# Altium PCB Morpheus_bottom.PcbDoc (part 1 of 2)
Units mm, origin at the board's own origin, x right, y up, seen from the top; angles counter-clockwise.
Board outline 38.8 x 25.11 mm, 4 copper layers (Top Layer, GND, PWR, Bottom Layer), stack 0.981 mm thick; 78 components, 39 nets, 307 pads, 147 vias.
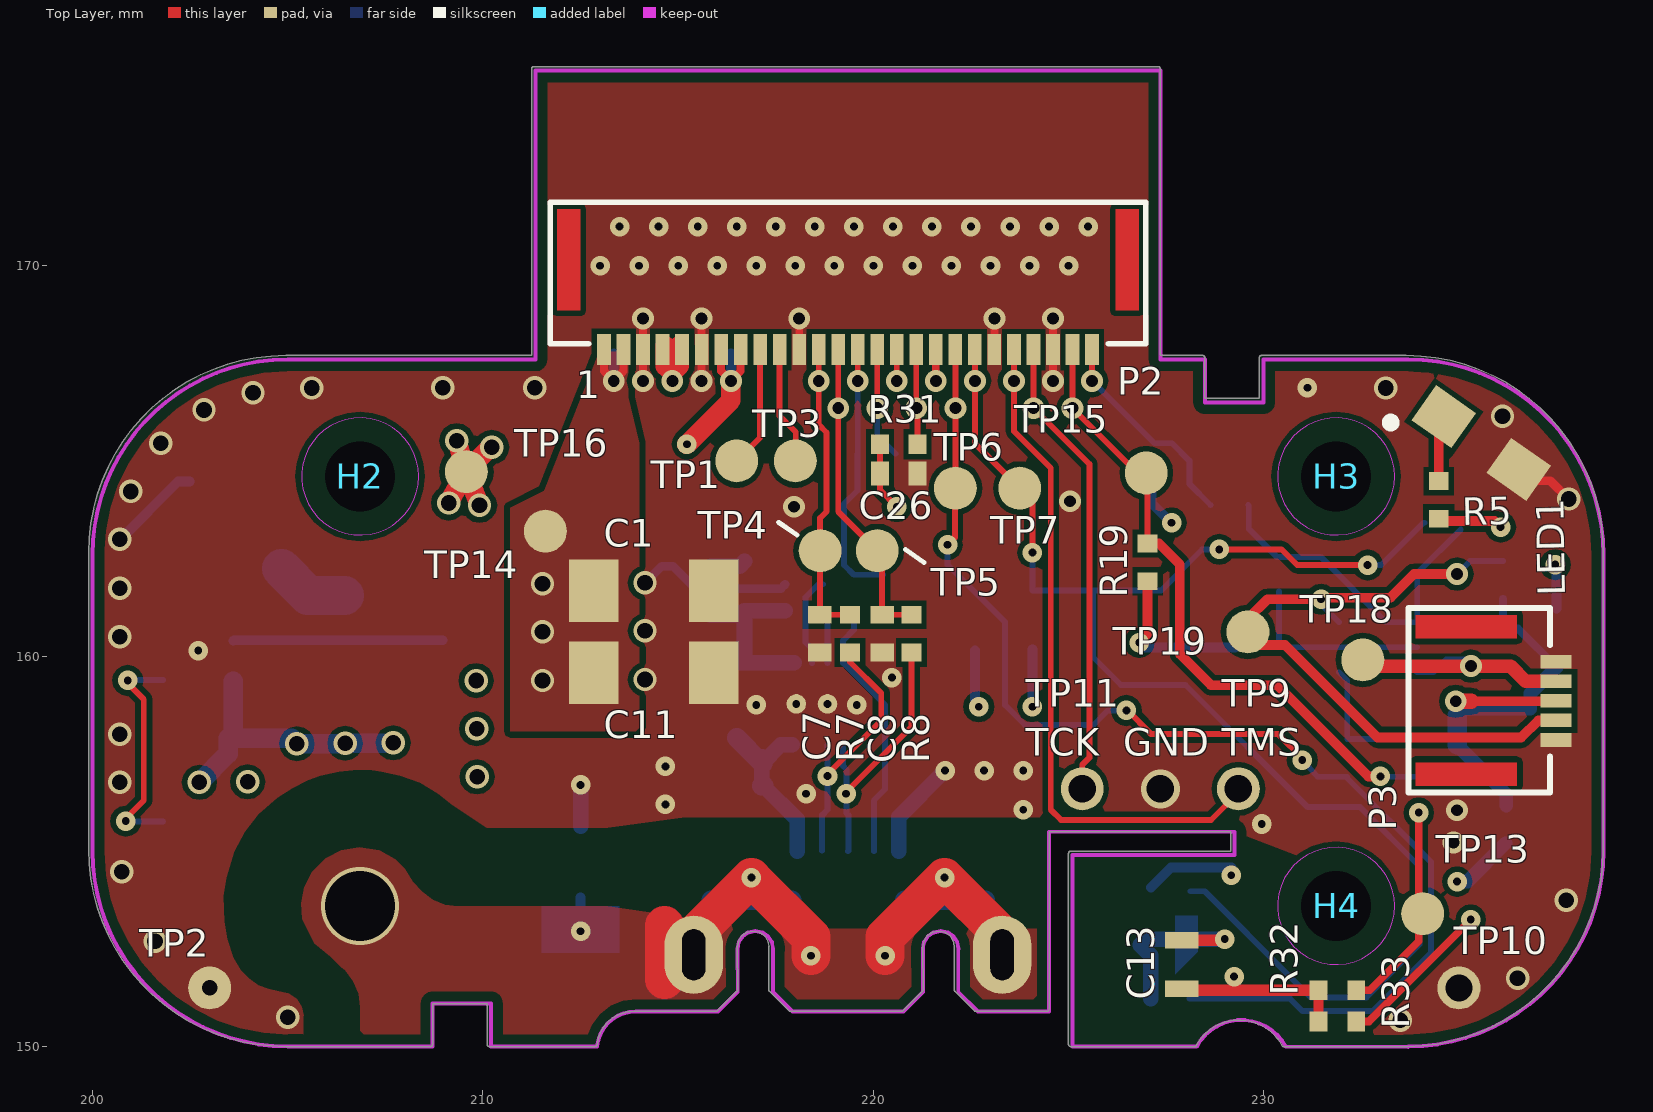
[diagram p0: Top Layer view]
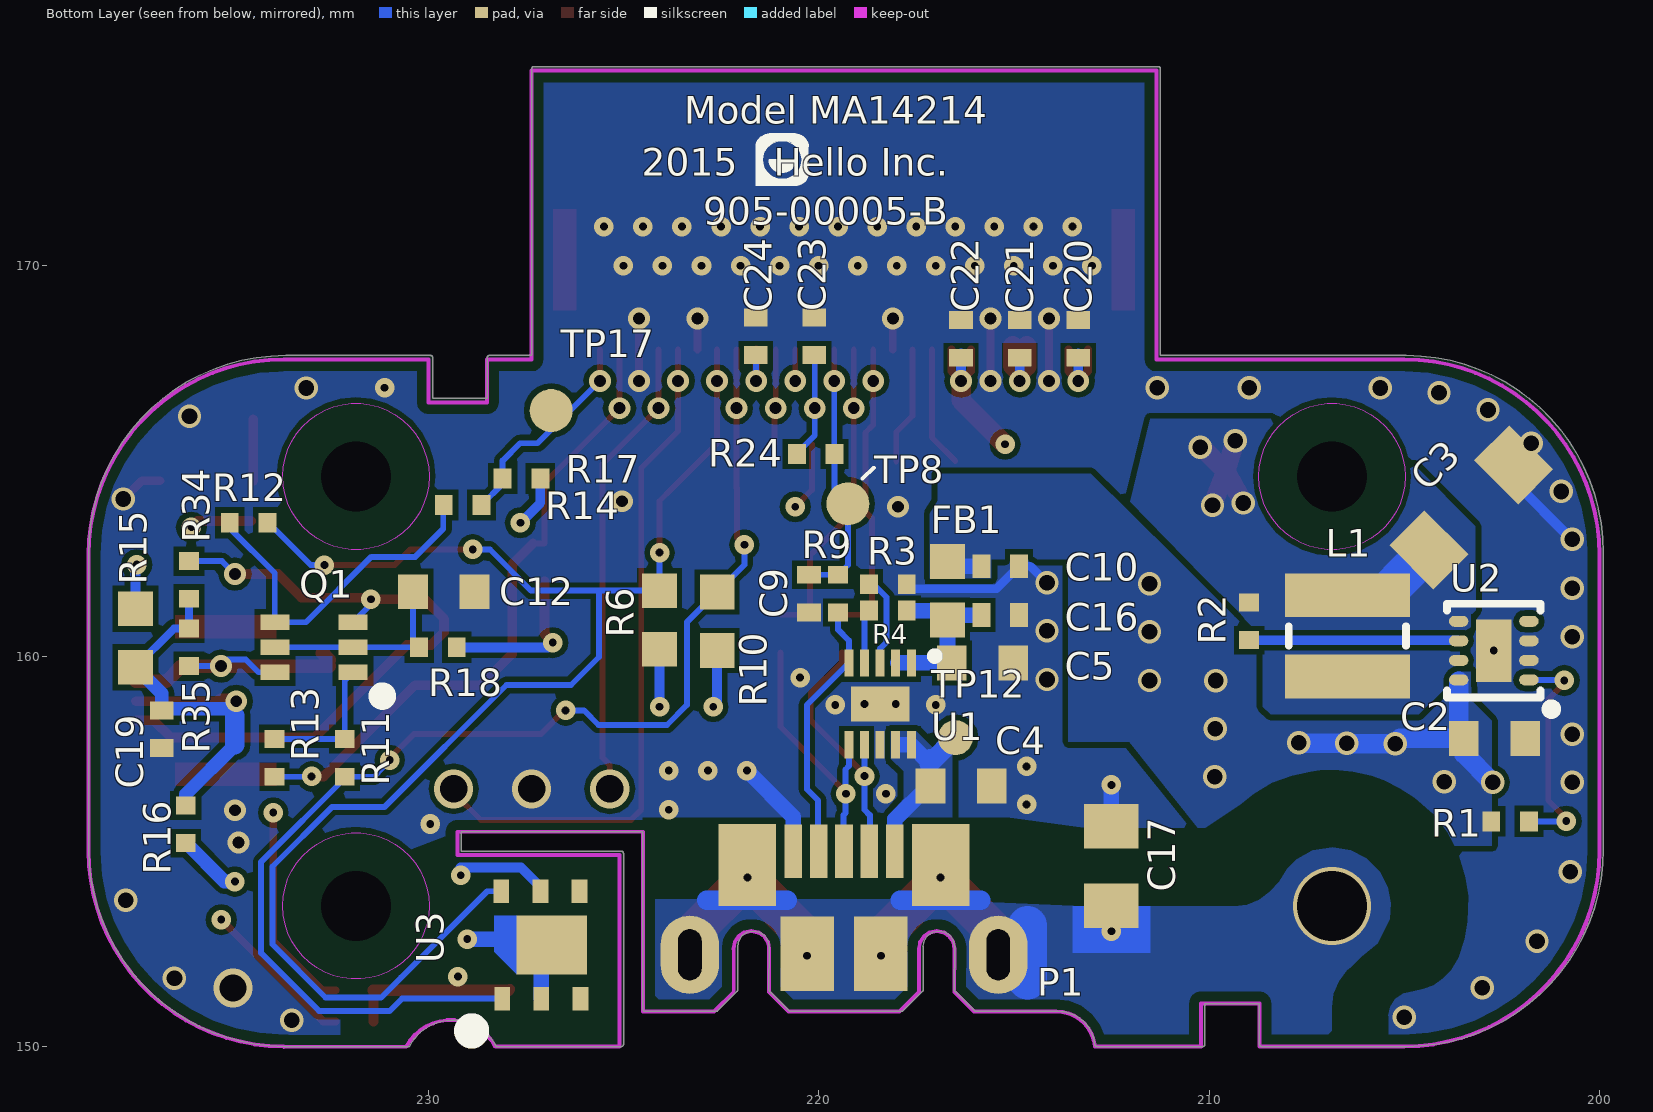
[diagram p1: Bottom Layer view, seen from below]
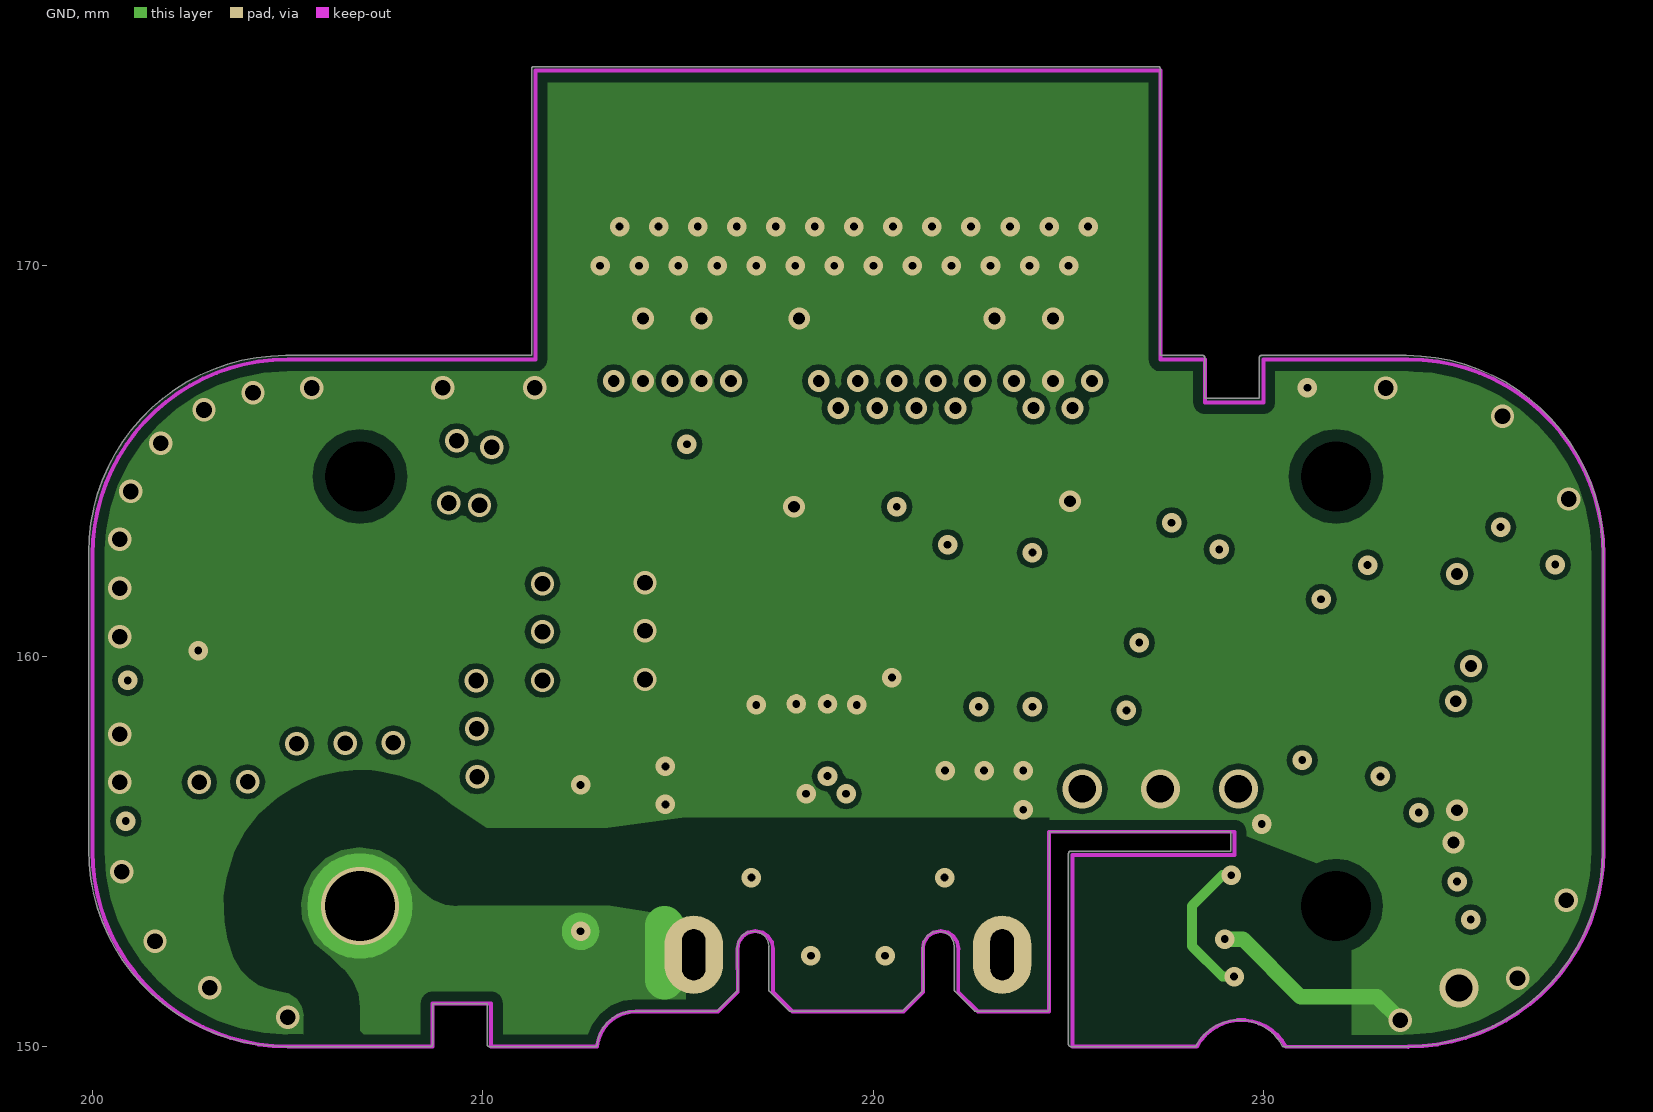
[diagram p2: GND]
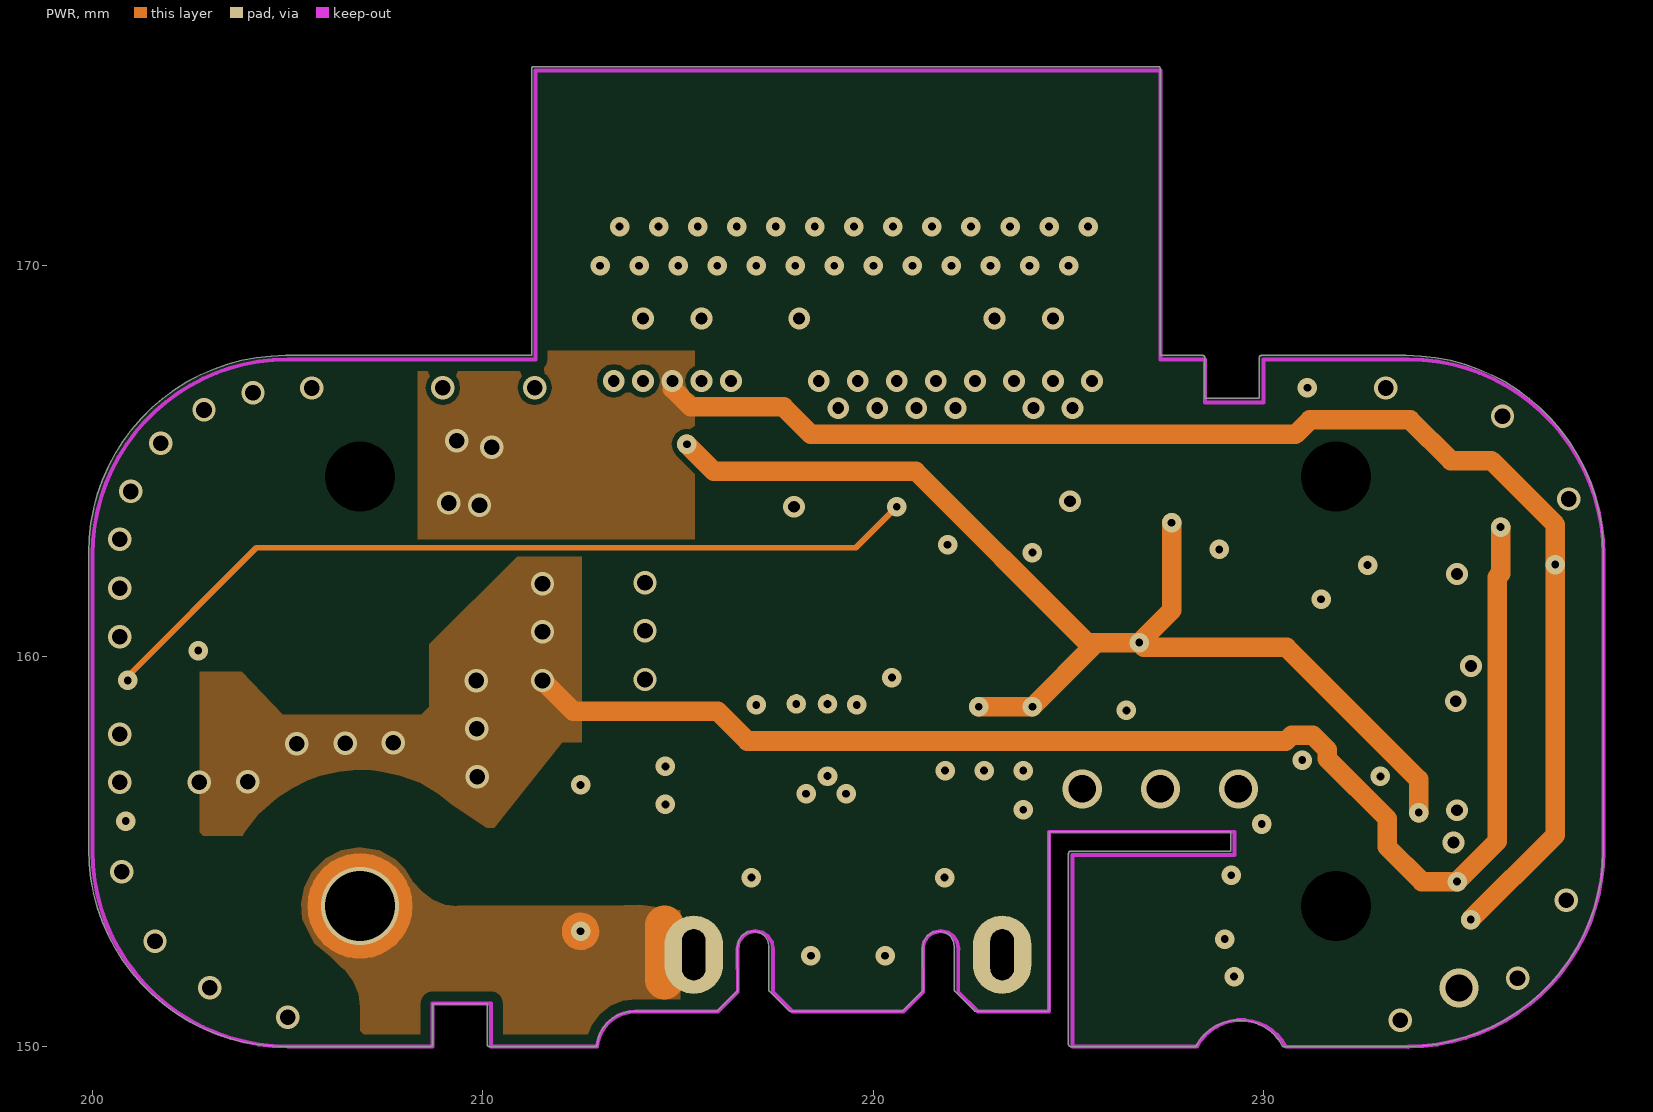
[diagram p3: PWR]

## Layer stack, top to bottom
Top Solder: solder mask 0.0102, Solder Resist, Dk 3.5
Top Layer: signal copper 0.0356
Dielectric1: core 0.254, FR-4, Dk 4.2
GND: signal copper 0.036
Dielectric2: prepreg 0.33, FR-4, Dk 4.2
PWR: signal copper 0.036
Dielectric3: core 0.254, FR-4, Dk 4.2
Bottom Layer: signal copper 0.0356
Bottom Solder: solder mask 0.0102, Solder Resist, Dk 3.5

## Board outline
204.947,149.999 ccw(c204.948,150.05) 204.948,149.999 208.658,149.999 ccw(c208.658,150.05) 208.709,150.05 208.709,151.099 210.108,151.099 210.108,150.05 ccw(c210.158,150.05) 210.158,149.999 212.873,149.999 ccw(c212.873,150.05) 212.923,150.045 cw(c213.868,149.95) 213.868,150.899 215.973,150.899 ccw(c215.973,150.95) 216.009,150.914 216.509,151.414 ccw(c216.473,151.45) 216.524,151.45 ccw(c216.473,151.45) 216.524,151.45 216.515,152.545 216.547,152.706 216.635,152.838 216.767,152.926 216.923,152.957 217.079,152.926 217.211,152.838 217.3,152.706 217.327,152.569 ccw(c217.373,152.55) 217.323,152.55 217.323,151.45 ccw(c217.373,151.45) 217.338,151.414 217.838,150.914 217.837,150.914 ccw(c217.873,150.95) 217.873,150.899 220.723,150.899 ccw(c220.723,150.95) 220.759,150.914 221.259,151.414 ccw(c221.223,151.45) 221.274,151.45 ccw(c221.223,151.45) 221.274,151.45 221.265,152.545 221.297,152.706 221.385,152.838 221.517,152.926 221.673,152.957 221.829,152.926 221.961,152.838 222.05,152.706 222.077,152.569 ccw(c222.123,152.55) 222.073,152.55 222.073,151.45 ccw(c222.123,151.45) 222.088,151.414 222.588,150.914 222.587,150.914 ccw(c222.623,150.95) 222.623,150.899 224.448,150.899 ccw(c224.448,150.95) 224.499,150.95 224.499,155.499 229.148,155.499 229.148,155 225.048,155 ccw(c225.048,154.95) 224.998,154.95 224.998,150.05 ccw(c225.048,150.05) 225.048,149.999 228.226,149.995 228.228,149.995 228.226,149.995 ccw(c228.228,150.046) 228.272,150.022 cw(c229.371,149.427) 230.472,150.019 ccw(c230.516,150.043) 230.516,149.992 233.648,149.989 ccw(c233.648,150.039) 233.68,149.999 ccw(c233.648,155.05) 238.699,155.05 238.699,162.65 ccw(c233.648,162.65) 233.65,167.7 ccw(c233.648,167.65) 233.648,167.7 229.938,167.7 ccw(c229.938,167.65) 229.888,167.65 229.888,166.6 228.489,166.6 228.489,167.65 ccw(c228.438,167.65) 228.438,167.7 227.349,167.7 227.349,175.05 ccw(c227.298,175.05) 227.298,175.1 211.298,175.1 ccw(c211.298,175.05) 211.248,175.05 211.248,167.7 204.948,167.7 cw(c204.948,167.65) 204.949,167.7 204.948,167.7 ccw(c204.948,162.65) 199.898,162.651 ccw(c199.948,162.65) 199.898,162.65 199.898,155.05 cw(c199.948,155.05) 199.898,155.051 199.898,155.05 ccw(c204.948,155.05)

## Design rules (kind name [scope] priority, off if disabled: settings)
AssemblyTestPointUsage [All] p1: valid=2
AssemblyTestpoint [(IsPad And (OnTopLayer Or OnBottomLayer))] p1: testpointundercomponent=FALSE minsize=0.3 maxsize=2.54 preferedsize=0.6 minholesize=0 maxholesize=1.016 preferedholesize=0 testpointgrid=0.025 usegrid=FALSE gridtolerance=0 allowsidetop=TRUE allowsidebottom=TRUE minspacing=1 compbodyclearance=1 boardedgeclearance=1
Clearance Net_Tie [InComponentClass('Net Tie') vs InComponentClass('Net Tie')] p1: gap=0
Clearance Solderbridges [InComponentClass('Solderbridges') vs InComponentClass('Solderbridges')] p2: gap=0
Clearance "Hole clearance" [All vs (InPadClass('NPTH'))] p3: gap=0.3
Clearance "Board clearance" [InPolygon vs OnLayer('Keep-Out LAyer')] p4: gap=0.254
Clearance "Polygon to Polygon" [InPolygon vs InPolygon] p5: gap=0.15
Clearance [All] p6: gap=0.14
DiffPairsRouting [All] p1: maxlimit=0.254 minlimit=0.15 mostfreqgap=0.254 toplayer_prefgap=0.15 toplayer_minwidth=0.381 toplayer_maxwidth=0.381 toplayer_prefwidth=0.381 midlayer2_minwidth=0.381 midlayer2_maxwidth=0.381 midlayer2_prefwidth=0.381 midlayer3_minwidth=0.381 midlayer3_maxwidth=0.381 midlayer3_prefwidth=0.381 bottomlayer_prefgap=0.15 bottomlayer_minwidth=0.381 bottomlayer_maxwidth=0.381 bottomlayer_prefwidth=0.381 maxuncoupledlength=12.7
FabricationTestpoint [(IsPad And (OnTopLayer Or OnBottomLayer)) Or (IsVia) Or (IsPad And OnMultiLayer)] p1: side=3 testpointundercomponent=TRUE minsize=0.3 maxsize=2.54 preferedsize=0.6 minholesize=0 maxholesize=1.016 preferedholesize=0 testpointgrid=0.025 allowsidetop=TRUE allowsidebottom=TRUE usegrid=FALSE gridtolerance=0 minspacing=1 compbodyclearance=1 boardedgeclearance=1
FanoutControl Fanout_Default [All] p5: bgadir=Out bgaviamode=Centered fanoutstyle=Staggered fanoutdirection=Alternating viagrid=0.025 // Fanout_Default (Default Rule)
HoleSize [All] p1 off: absolutevalues=TRUE maxlimit=5 minlimit=0.35 maxpercent=80.000 minpercent=20.000
NetAntennae [NOT InComponent('T1') AND NOT InComponent('T2') AND NOT InComponent('T3') AND NOT InComponent('T3') AND NOT InComponent('T4') AND NOT InComponent('T5') AND NOT InComponent('T6') AND NOT InComponent('T7') AND NOT InComponent('T8')] p1: netantennaetolerance=0
PasteMaskExpansion [All] p1: expansion=-0.05
PlaneConnect [All] p1: planeconnectstyle=Relief reliefexpansion=0.254 reliefentries=4 reliefconductorwidth=0.254 reliefairgap=0.254
PolygonConnect PolygonConnect_27 [All vs IsNamedPolygon('Bottom GND')] p1: connectstyle=Direct reliefconductorwidth=0.254 reliefentries=4 polygonreliefangle="90 Angle" airgapwidth=0.254
PolygonConnect PolygonConnect_26 [All vs IsNamedPolygon('GND on GND')] p2: connectstyle=Direct reliefconductorwidth=0.254 reliefentries=4 polygonreliefangle="90 Angle" airgapwidth=0.254
PolygonConnect PolygonConnect_25 [All vs IsNamedPolygon('Chassis GND')] p3: connectstyle=Direct reliefconductorwidth=0.254 reliefentries=4 polygonreliefangle="90 Angle" airgapwidth=0.254
PolygonConnect PolygonConnect_24 [All vs IsNamedPolygon('3.3V')] p4: connectstyle=Direct reliefconductorwidth=0.254 reliefentries=4 polygonreliefangle="90 Angle" airgapwidth=0.254
PolygonConnect PolygonConnect_23 [All vs IsNamedPolygon('3.3V Bottom')] p5: connectstyle=Direct reliefconductorwidth=0.254 reliefentries=4 polygonreliefangle="90 Angle" airgapwidth=0.254
PolygonConnect PolygonConnect_22 [All vs IsNamedPolygon('5V PWR')] p6: connectstyle=Direct reliefconductorwidth=0.254 reliefentries=4 polygonreliefangle="90 Angle" airgapwidth=0.254
PolygonConnect PolygonConnect_21 [All vs IsNamedPolygon('5V Bottom')] p7: connectstyle=Direct reliefconductorwidth=0.254 reliefentries=4 polygonreliefangle="90 Angle" airgapwidth=0.254
PolygonConnect PolygonConnect_20 [All vs IsNamedPolygon('VBUS_IN')] p8: connectstyle=Direct reliefconductorwidth=0.254 reliefentries=4 polygonreliefangle="90 Angle" airgapwidth=0.254
PolygonConnect PolygonConnect_19 [All vs IsNamedPolygon('3.3V_SWITCHER_SW')] p9: connectstyle=Direct reliefconductorwidth=0.254 reliefentries=4 polygonreliefangle="90 Angle" airgapwidth=0.254
PolygonConnect PolygonConnect_18 [All vs IsNamedPolygon('5V Top')] p10: connectstyle=Direct reliefconductorwidth=0.254 reliefentries=4 polygonreliefangle="90 Angle" airgapwidth=0.254
PolygonConnect PolygonConnect_17 [All vs IsNamedPolygon('Top GND')] p11: connectstyle=Direct reliefconductorwidth=0.254 reliefentries=4 polygonreliefangle="90 Angle" airgapwidth=0.254
PolygonConnect PolygonConnect_16 [All vs IsNamedPolygon('Bottom GND')] p12: connectstyle=Direct reliefconductorwidth=0.254 reliefentries=4 polygonreliefangle="90 Angle" airgapwidth=0.254
PolygonConnect PolygonConnect_15 [All vs IsNamedPolygon('VBUS_IN')] p13: connectstyle=Direct reliefconductorwidth=0.254 reliefentries=4 polygonreliefangle="90 Angle" airgapwidth=0.254
PolygonConnect PolygonConnect_14 [All vs IsNamedPolygon('Chassis GND')] p14: connectstyle=Direct reliefconductorwidth=0.254 reliefentries=4 polygonreliefangle="90 Angle" airgapwidth=0.254
PolygonConnect PolygonConnect_13 [All vs IsNamedPolygon('Chassis GND')] p15: connectstyle=Direct reliefconductorwidth=0.254 reliefentries=4 polygonreliefangle="90 Angle" airgapwidth=0.254
PolygonConnect PolygonConnect_12 [All vs IsNamedPolygon('Chassis GND')] p16: connectstyle=Direct reliefconductorwidth=0.254 reliefentries=4 polygonreliefangle="90 Angle" airgapwidth=0.254
PolygonConnect PolygonConnect_11 [All vs IsNamedPolygon('Chassis GND')] p17: connectstyle=Direct reliefconductorwidth=0.254 reliefentries=4 polygonreliefangle="90 Angle" airgapwidth=0.254
PolygonConnect PolygonConnect_10 [All vs IsNamedPolygon('3.3V')] p18: connectstyle=Direct reliefconductorwidth=0.254 reliefentries=4 polygonreliefangle="90 Angle" airgapwidth=0.254
PolygonConnect PolygonConnect_9 [All vs IsNamedPolygon('GND on GND')] p19: connectstyle=Direct reliefconductorwidth=0.254 reliefentries=4 polygonreliefangle="90 Angle" airgapwidth=0.254
PolygonConnect PolygonConnect_8 [All vs IsNamedPolygon('Bottom GND')] p20: connectstyle=Direct reliefconductorwidth=0.254 reliefentries=4 polygonreliefangle="90 Angle" airgapwidth=0.254
PolygonConnect PolygonConnect_7 [All vs IsNamedPolygon('Top GND')] p21: connectstyle=Direct reliefconductorwidth=0.254 reliefentries=4 polygonreliefangle="90 Angle" airgapwidth=0.254
PolygonConnect PolygonConnect_6 [All vs IsNamedPolygon('5V Top')] p22: connectstyle=Direct reliefconductorwidth=0.254 reliefentries=4 polygonreliefangle="90 Angle" airgapwidth=0.254
PolygonConnect PolygonConnect_5 [All vs IsNamedPolygon('3.3V Bottom')] p23: connectstyle=Direct reliefconductorwidth=0.254 reliefentries=4 polygonreliefangle="90 Angle" airgapwidth=0.254
PolygonConnect PolygonConnect_4 [All vs IsNamedPolygon('5V PWR')] p24: connectstyle=Direct reliefconductorwidth=0.254 reliefentries=4 polygonreliefangle="90 Angle" airgapwidth=0.254
PolygonConnect PolygonConnect_3 [All vs IsNamedPolygon('5V Bottom')] p25: connectstyle=Direct reliefconductorwidth=0.254 reliefentries=4 polygonreliefangle="90 Angle" airgapwidth=0.254
PolygonConnect PolygonConnect_2 [All vs IsNamedPolygon('VBUS')] p26: connectstyle=Direct reliefconductorwidth=0.254 reliefentries=4 polygonreliefangle="90 Angle" airgapwidth=0.254
PolygonConnect PolygonConnect_1 [All vs IsNamedPolygon('3.3V_SWITCHER_SW')] p27: connectstyle=Direct reliefconductorwidth=0.254 reliefentries=4 polygonreliefangle="90 Angle" airgapwidth=0.254
PolygonConnect PolygonConnect_ESD_GND [InNamedPolygon('ESD_GND')] p28: connectstyle=Relief reliefconductorwidth=0.5 reliefentries=4 polygonreliefangle="90 Angle" airgapwidth=0.254
PolygonConnect "Polygon Connect Net Tie" [(InComponentClass('Net Tie'))] p29: connectstyle=Direct reliefconductorwidth=0.254 reliefentries=4 polygonreliefangle="90 Angle" airgapwidth=0.254
PolygonConnect [All] p30: connectstyle=Relief reliefconductorwidth=0.3 reliefentries=4 polygonreliefangle="90 Angle" airgapwidth=0.15
RoutingCorners [All] p1: cornerstyle=45-Degree minsetback=1 maxsetback=5
RoutingVias [All] p1: holewidth=0.2 width=0.5 viastyle="Through Hole" minholewidth=0.2 minwidth=0.5 maxholewidth=1 maxwidth=1
ShortCircuit "Net Tie" [InComponentClass('Net Tie') vs InComponentClass('Net Tie')] p1: allowed=TRUE
ShortCircuit [All] p2: allowed=FALSE
SolderMaskExpansion [All] p1: expansion=0.07
Width "Power width" [InNetClass('Power')] p1: maxlimit=1 minlimit=0.2 preferedwidth=0.25
Width LED [InNetClass('LED')] p2: maxlimit=0.15 minlimit=0.15 preferedwidth=0.15
Width TP [InNetClass('TP')] p3: maxlimit=0.15 minlimit=0.15 preferedwidth=0.15
Width [All] p4: maxlimit=0.5 minlimit=0.15 preferedwidth=0.15
19 further rules are at their usual default settings.

## Classes and differential pairs
component class Morpheus_bottom: C12 C19 C20 C21 C22 C23 C24 H2 H3 H4 LED1 P2 P3 Q1 R5 R6 R10 R11 R12 R13 R14 R15 R16 R17 R18 R19 R24 R34 R35 TP1 TP2 TP3 TP4 TP5 TP6 TP7 TP8 TP9 TP10 TP11 TP13 TP15 TP17 TP18 TP19
component class Power_management: C1 C2 C3 C4 C5 C7 C8 C9 C10 C11 C16 C17 C26 FB1 L1 P1 R1 R2 R3 R4 R7 R8 R9 R31 TP12 TP14 TP16 U1 U2
component class Temperature_humidity: C13 R32 R33 U3
pad class NPTH: H2-1 H3-1 H4-1
net class Power: 1.8V 3.3V 5V CHASSIS_GND GND VBUS VCC_LED

## Components (designator, comment, footprint, x,y, rotation, side; value= is the part's Value field where it differs from the comment)
C1 "100u" CAP1206_SENSE_DVT 214.375,161.675 r180 top
C2 "10u" CAP0603_SENSE_DVT 202.687,157.891 r0 bottom locked
C3 "22uF" CAP1206_SENSE_DVT 203.284,163.81 r315 bottom
C4 "10u" CAP0603_SENSE_DVT 216.35,156.675 r0 bottom
C5 "10u" CAP0603_SENSE_DVT 215.8,159.825 r0 bottom
C7 "1000p" CAP0402_SENSE_DVT 218.625,160.575 r90 top
C8 "1000p" CAP0402_SENSE_DVT 220.225,160.575 r90 top
C9 "1000p" CAP0402_SENSE_DVT 220.25,161.6 r90 bottom
C10 "1000p" CAP0402_SENSE_DVT 215.35,162.3 r0 bottom
C11 "100u" CAP1206_SENSE_DVT 214.375,159.575 r180 top
C12 "10000p" CAP0603_SENSE_DVT 229.6,161.65 r180 bottom
C13 "0.1u" CAP0603 227.9,152.1 r270 top
C16 "1000p" CAP0402_SENSE_DVT 215.35,161.05 r0 bottom
C17 ".01uF" CAP0805_SENSE_DVT 212.5,154.625 r90 bottom
C19 "2200p" CAP0402_SENSE_DVT 236.825,158.125 r90 bottom
C20 "2200p" CAP0402_SENSE_DVT 213.35,168.125 r90 bottom
C21 "2200p" CAP0402_SENSE_DVT 214.85,168.125 r90 bottom
C22 "2200p" CAP0402_SENSE_DVT 216.35,168.125 r90 bottom
C23 "2200p" CAP0402_SENSE_DVT 220.112,168.191 r90 bottom
C24 "2200p" CAP0402_SENSE_DVT 221.612,168.191 r90 bottom
C26 "10000p" CAP0402_SENSE_DVT 220.65,164.675 r180 top
FB1 "742792641" RES0603_SENSE_DVT 216.7,161.675 r90 bottom
H2 "DNP" HOLE_ROUND_1.8mm 206.85,164.6 r0 top locked
H3 "DNP" HOLE_ROUND_1.8mm 231.85,164.6 r0 top locked
H4 "DNP" HOLE_ROUND_1.8mm 231.85,153.6 r0 top locked
L1 "1u" INDC3030X13N 206.457,160.516 r90 bottom locked
LED1 "DNP" LED_Kingbright 235.569,165.457 r145 top
P1 "105164-001" molex_105164-001 219.35,153.65 r180 bottom
P2 "51281-2694" molex_51281-2694_reverse 219.35,167.85 r180 top locked
P3 "51281-0594" molex_51281-0594 237.483,153.602 r270 top
Q1 "DMG6301UDW-7" SC-70-6 232.925,160.225 r90 bottom
R1 "10k" RES0402_SENSE_DVT 202.287,155.766 r0 bottom
R2 "10k" RES0402_SENSE_DVT 208.973,160.891 r270 bottom
R3 "10k" RES0402_SENSE_DVT 218.225,161.839 r180 bottom
R4 "10k" RES0402_SENSE_DVT 218.225,161.164 r180 bottom
R5 "DNP" RES0402_SENSE_DVT 234.483,163.999 r270 top
R6 "DNP" RES0603_SENSE_DVT 224.075,160.927 r270 bottom
R7 "10" RES0402_SENSE_DVT 219.4,160.575 r270 top
R8 "10" RES0402_SENSE_DVT 220.975,160.575 r270 top
R9 "1k" RES0402_SENSE_DVT 219.5,161.6 r90 bottom
R10 "DNP" RES0603_SENSE_DVT 222.6,160.891 r270 bottom
R11 "DNP" RES0402_SENSE_DVT 232.137,157.391 r90 bottom
R12 "DNP" RES0402_SENSE_DVT 234.601,163.414 r0 bottom
R13 "0" RES0402_SENSE_DVT 233.937,157.391 r270 bottom
R14 "0" RES0402_SENSE_DVT 229.12,163.867 r180 bottom
R15 "DNP" RES0603_SENSE_DVT 237.5,160.465 r90 bottom
R16 "0" RES0402_SENSE_DVT 236.212,155.691 r270 bottom
R17 "2.7k" RES0402_SENSE_DVT 227.611,164.546 r180 bottom
R18 "10k" RES0402_SENSE_DVT 229.75,160.225 r180 bottom
R19 "DNP" RES0402_SENSE_DVT 227.025,162.4 r270 top
R24 "3.6k" RES0402_SENSE_DVT 220.075,165.175 r180 bottom
R31 "10" RES0402_SENSE_DVT 220.65,165.425 r180 top
R32 "0" RES0402_SENSE_DVT 231.887,151.441 r0 top
R33 "DNP" RES0402_SENSE_DVT 231.887,150.641 r0 top
R34 "DNP" RES0402_SENSE_DVT 236.125,161.95 r270 bottom
R35 "DNP" RES0402_SENSE_DVT 236.125,160.225 r90 bottom
TP1 "TP" TP-1.1#1 213.92,163.7 r90 top
TP2 "TP" TP-1.1#2 267.263,152.182 r90 top
TP3 "TP" TP-1.1#3 215.6,163.7 r90 top
TP4 "TP" TP-1.1#4 218.637,162.7 r0 top
TP5 "TP" TP-1.1#4 220.1,162.7 r90 top
TP6 "TP" TP-1.1#4 222.1,164.3 r90 top
TP7 "TP" TP-1.1#4 223.75,164.3 r90 top
TP8 "TP" TP-1.1#5 221,159.041 r90 top
TP9 "TP" TP-1.1#6 254.837,152.182 r90 top
TP10 "TP" TP-1.1#7 247.712,152.182 r90 top
TP11 "TP" TP-1.1#8 240.612,152.182 r90 top
TP12 "TP" TP-1.1#9 216.497,157.91 r90 bottom
TP13 "TP" TP-1.1#4 234.07,153.402 r90 top
TP14 "TP" TP-1.1#4 211.6,163.2 r90 top
TP15 "TP" TP-1.1#4 226.99,164.69 r90 top
TP16 "TP" TP-1.1#10 210.21,162.9 r90 top
TP17 "TP" TP-1.1#4 226.85,166.29 r90 bottom
TP18 "TP" TP-1.1#4 232.536,159.902 r90 top
TP19 "TP" TP-1.1#4 229.595,160.618 r90 top
U1 "TPD4S014DSQ" DSQ10-1500X900TP 218.425,158.775 r270 bottom
U2 "TPS62082" QFN50P200X200X80_HS-9N 202.707,160.141 r90 bottom locked
U3 "HTU21D" HTU2xx 227.112,152.6 r270 bottom

## Footprints (in the part's own frame and the unit in brackets; to place one, negate y for a bottom-side part, rotate by r counter-clockwise, add the part's x,y. Pads: shape width x height; smd on the part's side, far side on the other; paste and mask are expansions set on the pad)
CAP0402_SENSE_DVT [mil] "Chip Capacitor, 2-Leads"
  rect 18x24 smd: 1(-19,0) 2(19,0)
  body extent -21,-11 21,11, height 22
CAP0603 [mm] "Chip Capacitor, 2-Leads, Body 0603 / 1.60x0.8mm, IPC High Density"
  rect 0.425x0.85 smd: 1(-0.625,0) 2(0.625,0)
  body extent -0.8,-0.4 0.8,0.4, height 0.8
CAP0603_SENSE_DVT [mil] "Chip Capacitor, 2-Leads"
  rect 30x35 smd: 1(-31,0) 2(31,0)
  body extent -31,-16 32,16, height 31
CAP0805_SENSE_DVT [mil] "Chip Capacitor, 2-Leads"
  rect 45x55 smd: 1(-40,0) 2(40,0)
  body extent -39,-25 39,25, height 20
CAP1206_SENSE_DVT [mil] "Chip Capacitor, 2-Leads"
  rect 50x63 smd: 1(-60.5,0) 2(60.5,0)
  body extent -64,-31 65,31, height 63
DSQ10-1500X900TP [mm] "SON, 10-Leads, Body 2x2mm, Pitch 0.4mm, Thermal Pad 1.5x0.9mm, TI Recommended"
  rect 0.7x0.23 smd paste-0.115 mask+0.05: 1(-1.05,0.8) 2(-1.05,0.4) 3(-1.05,0) 4(-1.05,-0.4) 5(-1.05,-0.8) 6(1.05,-0.8) 7(1.05,-0.4) 8(1.05,0) 9(1.05,0.4) 10(1.05,0.8)
  round 0.5 hole 0.2: 11(0,-0.4) 11(0,0.4)
  rect 0.9x1.5 smd paste-0.45 mask+0.05: 11(0,0)
  silkscreen extent -1.33,1.3 -1.12,1.5, body extent -1.05,-1.05 1.05,1.05, height 0.8
HOLE_ROUND_1.8mm [mm]
  round 1.2 hole 1.8 unplated paste-2 mask-2: 1(0,0)
HTU2xx [mm]
  rect 0.6x0.4 smd paste-0.05: 1(1.375,-0.987) 2(1.375,0.013) 3(1.375,1.013) 4(-1.375,0.988) 5(-1.375,-0.012) 6(-1.375,-1.012)
  rect 1.5x1.8 smd paste-0.05: 7(0,0.275)
  Top Layer region: -0.75,-0.625 -0.75,-1.2 0.175,-1.2 0.75,-0.625
  silkscreen extent 2.1,-1.88 2.3,-1.68, body extent -1.5,-1.5 1.5,1.5, height 0.9
INDC3030X13N [mm] "Chip Inductor, 2-Leads, Body 3.00x3.00mm, IPC Medium Density"
  rect 1.12x3.2 smd: 1(-1.04,0) 2(1.04,0)
  silkscreen extent -0.25,-1.5 0.25,1.5, body extent -1.6,-1.6 1.6,1.6, height 1.3
LED_Kingbright [mm]
  rect 1.25x1.1 smd: 1(1.175,0) 2(-1.175,0)
  silkscreen extent 2.1,0.8 2.3,1
molex_51281-0594 [mm] "Molex 5-pin 0.5mm pitch connector"
  rect 0.35x0.8 smd: 1(-4.25,0) 2(-4.75,0) 3(-5.25,0) 4(-5.75,0) 5(-6.25,0)
  Top Layer region: -3.675,-3.6 -3.075,-3.6 -3.075,-1 -3.675,-1
  Top Layer region: -7.45,-3.6 -6.85,-3.6 -6.85,-1 -7.45,-1
  silkscreen extent -7.62,-3.78 -2.9,-0.15
molex_51281-2694_reverse [mm] "Molex 26-pin 0.5mm pitch connector with reverse pinout"
  rect 0.35x0.8 smd: 1(6.25,0) 2(5.75,0) 3(5.25,0) 4(4.75,0) 5(4.25,0) 6(3.75,0) 7(3.25,0) 8(2.75,0) 9(2.25,0) 10(1.75,0) 11(1.25,0) 12(0.75,0) 13(0.25,0) 14(-0.25,0) 15(-0.75,0) 16(-1.25,0) 17(-1.75,0) 18(-2.25,0) 19(-2.75,0) 20(-3.25,0) 21(-3.75,0) 22(-4.25,0) 23(-4.75,0) 24(-5.25,0) 25(-5.75,0) 26(-6.25,0)
  Top Layer region: -7.45,-3.6 -6.85,-3.6 -6.85,-1 -7.45,-1
  Top Layer region: 6.85,-3.6 7.45,-3.6 7.45,-1 6.85,-1
  silkscreen extent -7.62,-3.78 7.63,-0.15, body extent -7.55,-3.77 7.55,0.28, height 1.15
molex_105164-001 [mm] "Molex reverse flangless USB receptacle"
  rect 0.45x1.38 smd: 1(1.3,1.35) 2(0.65,1.35) 3(0,1.35) 4(-0.65,1.35) 5(-1.3,1.35)
  rrect100% 1.5x2 hole 0.6 slot 1.3 at 90 deg: 6(-3.95,-1.3) 6(3.95,-1.3)
  rect 1.475x2.1 smd: 6(-2.475,1) 6(2.475,1)
  rect 1.375x1.9 smd: 6(-0.937,-1.275) 6(0.938,-1.275)
  body extent -4.1,-3.45 4.1,1.7, height 2.45
QFN50P200X200X80_HS-9N [mm] "QFN, 8-Leads, Body 2.00x2.00mm, Pitch 0.50mm, Thermal Pad 1.60x0.90mm, IPC Medium Density"
  oval 0.28x0.5 smd: 1(-0.75,-0.9) 2(-0.25,-0.9) 3(0.25,-0.9) 4(0.75,-0.9) 5(0.75,0.9) 6(0.25,0.9) 7(-0.25,0.9) 8(-0.75,0.9)
  rect 1.6x0.9 smd: 9(0,0)
  silkscreen extent -1.62,-1.6 1.2,1.2, body extent -1.05,-1.05 1.05,1.05, height 0.8
RES0402_SENSE_DVT [mil] "Chip resistor 0402"
  rect 18x20 smd: 1(-19,0) 2(19,0)
  body extent -24,-8 24,8, height 20
RES0603_SENSE_DVT [mil] "Chip resistor 0603"
  rect 35x35 smd: 1(-29.5,0) 2(29.5,0)
  body extent -33,-16 33,16, height 20
SC-70-6 [mm] "SC-70 with 6 leads"
  rect 0.4x0.75 smd paste-0.05: 1(-0.64,-1) 2(0,-1) 3(0.64,-1) 4(0.64,1) 5(0,1) 6(-0.64,1)
  silkscreen extent -1.35,-1.85 -1.15,-1.65, body extent -1.1,-1.2 1.1,1.2, height 1.1
TP-1.1#1 [mm] "1.1mm TestPoint"
  round 1.1 smd paste-1: 1(1.3,-2.58)
TP-1.1#2 [mm] "1.1mm TestPoint"
  round 1.1 smd paste-1: 1(-0.682,64.263)
TP-1.1#3 [mm] "1.1mm TestPoint"
  round 1.1 smd paste-1: 1(1.3,-2.4)
TP-1.1#4 [mm] "1.1mm TestPoint"
  round 1.1 smd paste-1: 1(0,0)
TP-1.1#5 [mm] "1.1mm TestPoint"
  round 1.1 smd far side paste-1: 1(4.859,1.75)
TP-1.1#6 [mm] "1.1mm TestPoint"
  round 1.1 smd paste-1: 1(4.418,25.487)
TP-1.1#7 [mm] "1.1mm TestPoint"
  round 1.1 smd paste-1: 1(-0.682,12.712)
TP-1.1#8 [mm] "1.1mm TestPoint"
  round 1.1 smd paste-1: 1(4.418,15.262)
TP-1.1#9 [mm]
  round 0.9 smd paste-1: 1(0,0)
TP-1.1#10 [mm] "1.1mm TestPoint"
  round 1.1 smd paste-1: 1(1.825,0.635)

## Part data
C1 C11: library part C_100u_20_10_X5R_1206, "Chip capacitor"
C2 C4 C5: library part C_10u_20_10_X5R_0603, "Chip capacitor"
C3: library part C_22u_20_10_X5R_1206, "Chip capacitor"
C7 C8 C9 C10 C16: library part C_1000p_10_50_X7R_0402, "Chip capacitor"
C12: library part C_10000p_10_50_X7R_0603, "Chip capacitor"
C13: library part C_0.1u_10_50_X7R_0603, "Chip capacitor"
C17: library part C_10000p_10_100_X7R_0805, "Chip capacitor"
C19 C20 C21 C22 C23 C24: library part C_2200p_5_16_STD_0402, "Chip capacitor"
C26: library part C_10000p_10_50_X7R_0402, "Chip capacitor"
FB1: library part FB_300_2_0.15_0603, "Ferrite bead, 300 ohm impedance"
H2 H3 H4: library part Hole, "general purpose hole"
L1: library part L_1u_20_?_0.39_1.4_2.5_1, "SMD power inductor, 1uH"
LED1: library part APT2012SGC, "Kingbright Green SMT LED"
P1: library part molex_105164-001, "Molex right-angle reverse flangeless USB Mini-B OTG receptacle"
P2: library part 51281-011, "Molex 26-pin 0.5mm pitch connector"
P3: library part molex_51281-0594, "Molex 5-pin 0.5mm pitch connector"
R1 R2 R3 R4 R18: library part R_10k_5_0.1_0402, "Chip Resistor"
R5: library part R_475_1_0.1_0402, "Chip Resistor"
R6 R10 R15: library part R_2.7k_1_0.1_0603, "Chip Resistor"
R7 R8 R11 R12 R31: library part R_10_1_0.1_0402, "Chip Resistor"
R9: library part R_1k_1_0.1_0402, "Chip Resistor"
R13 R14 R16 R32 R33: library part R_0_jumper_0.1_0402, "Chip Resistor"
R17 R19 R34 R35: library part R_2.7k_5_0.1_0402, "Chip Resistor"
R24: library part R_3.6k_1_0.1_0402, "Chip Resistor"
TP1 TP2 TP3 TP4 TP5 TP6 TP7 TP8 TP9 TP10 TP11 TP12 TP13 TP14 TP15 TP16 TP17 TP18 TP19: "testpoint"
U1: "TPD4S014 USB Charger Port Protection Including ESD Protection for all Lines and Over Voltage Protection on VBUS. D+/D-/ID pins are interchangable."
U2: "1.2A buck converter with snoozemode"
U3: "Meas-spec T/H sensor"

## Free pads (board coordinates)
  round 0.64 on Mech16: 1(201.525,157.05) 1(202.35,156.125) 1(202.35,160.875) 1(203.725,155.575) 1(203.725,157.075) 1(203.725,159.925) 1(203.725,161.425) 1(204.725,155.575) 1(204.725,157.075) 1(204.725,159.925) 1(204.725,161.425) 1(206.225,155.175) 1(206.225,155.925) 1(206.225,161.05) 1(206.225,161.8) 1(206.85,158.5) 1(207.225,155.175) 1(207.225,161.8) 1(208.2,158.125) 1(208.2,158.875) 1(210.3,154.925) 1(210.3,155.925) 1(210.3,156.925) 1(210.3,160.075) 1(210.3,161.075) 1(210.3,162.075) 1(211.3,154.925) 1(211.3,155.925) 1(211.3,156.925) 1(211.3,157.925) 1(211.3,159.075) 1(211.3,160.075) 1(211.3,161.075) 1(211.3,162.075) 1(213.325,158.65) 1(213.325,159.65) 1(213.325,160.65) 1(213.325,161.65) 1(218.4,158.05) 1(218.65,167.925) 1(219.65,167.925) 1(220.65,167.925) 1(221.65,167.925) 1(222.525,167.925) 1(223.525,167.925) 1(224.6,167.925) 1(225.6,167.925) 1(229.084,154.475) 1(230.15,151.7) 1(231.734,154.475)
  round 0.2 on Mech16: 1(201.525,157.05) 1(202.35,156.125) 1(202.35,160.875) 1(203.725,155.575) 1(203.725,157.075) 1(203.725,159.925) 1(203.725,161.425) 1(204.725,155.575) 1(204.725,157.075) 1(204.725,159.925) 1(204.725,161.425) 1(206.225,155.175) 1(206.225,155.925) 1(206.225,161.05) 1(206.225,161.8) 1(206.85,158.5) 1(207.225,155.175) 1(207.225,161.8) 1(208.2,158.125) 1(208.2,158.875) 1(210.3,154.925) 1(210.3,155.925) 1(210.3,156.925) 1(210.3,160.075) 1(210.3,161.075) 1(210.3,162.075) 1(211.3,154.925) 1(211.3,155.925) 1(211.3,156.925) 1(211.3,157.925) 1(211.3,159.075) 1(211.3,160.075) 1(211.3,161.075) 1(211.3,162.075) 1(213.325,158.65) 1(213.325,159.65) 1(213.325,160.65) 1(213.325,161.65) 1(218.4,158.05) 1(218.65,167.925) 1(219.65,167.925) 1(220.65,167.925) 1(221.65,167.925) 1(222.525,167.925) 1(223.525,167.925) 1(224.6,167.925) 1(225.6,167.925) 1(229.084,154.475) 1(230.15,151.7) 1(231.734,154.475)
  round 0.84 on Mech16: 1(215.25,151.345) 1(215.25,151.945) 1(223.45,151.345) 1(223.45,151.945)
  round 0.79 on Mech16: 1(216.925,154.525) 1(216.925,154.925) 1(221.775,154.525) 1(221.775,154.925)
  round 2.14 on Mech16: 1(236.825,152.425) 1(236.825,164.425)

## Via types
v1: diameter 0.5, hole 0.2, Top Layer to Bottom Layer, 45 vias
v2: diameter 0.6, hole 0.4, Top Layer to Bottom Layer, 40 vias
v3: diameter 0.559, hole 0.305, Top Layer to Bottom Layer, 31 vias
v4: diameter 0.5, hole 0.2, Top Layer to Bottom Layer, tented both sides, 26 vias
v5: diameter 1, hole 0.7, Top Layer to Bottom Layer, 4 vias
v6: diameter 2, hole 1.8, Top Layer to Bottom Layer, 1 vias

## Nets (pads, with @x,y where several pads share a name; then routed paths per layer and width w, separated by ;. In a path a pad name is that pad's centre, name@x,y a point inside that pad or via, vN(x,y) a via of type N, cw(c..) or ccw(c..) an arc to the next point about the centre after c; other vN are vias at no path point)
1.8V: C22.1 P2.7 P2.8 R6.2 R10.2 R17.2 R18.2 R19.2 R32.2 TP13.1 | length 48.7
  Top Layer w0.2: P2.7@216.1,167.85 216.1,167.3 v3(216.35,167.05) 216.6,167.3 P2.8@216.6,167.85 ; R32.2@232.37,151.441 232.716,151.441 233.969,152.694 v1(233.969,155.991)
  Top Layer w0.254: v1(226.811,160.345) 226.811,160.358 227.025,160.572 R19.2@227.025,161.917
  Top Layer w0.5: v1(215.225,165.425) 216.35,166.55 v3(216.35,167.05)
  PWR w0.5: v1(215.225,165.425) 215.91,164.74 221.085,164.74 221.085,164.735 225.475,160.345 225.718,160.345 ; v1@222.7,158.702 v1(224.075,158.702) 225.718,160.345 ; v1(227.639,163.414) 227.639,161.173 v1(226.811,160.345) ; v1(233.969,155.991) 233.969,156.84 230.584,160.225 226.931,160.225 v1(226.811,160.345) ; 225.718,160.345 v1(226.811,160.345)
  Bottom Layer w0.25: R10.2@222.6,160.142 222.6,158.8 v1(222.7,158.7) ; v1(224.075,158.702) R6.2@224.075,160.178 ; R17.2@227.128,164.546 227.128,163.926 v1(227.639,163.414)
  Bottom Layer w0.254: v3(216.35,167.05) C22.1@216.35,167.642 C22.1@216.35,167.75 ; v1(226.811,160.345) 226.931,160.225 R18.2@229.267,160.225
1.8V_DIN: Q1.1 R11.2 R13.1 | length 3.6
  Bottom Layer w0.15: Q1.1@231.925,159.585 232.137,159.373 R11.2@232.137,157.874 R13.1@233.937,157.874
1.8V_DOUT: Q1.4 R12.2 R14.1 | length 8.8
  Bottom Layer w0.15: R14.1@229.603,163.867 229.614,163.857 229.614,163.26 230.332,162.542 231.456,162.542 233.133,160.865 Q1.4@233.925,160.865 233.933,160.873 233.933,162.127 R12.2@235.045,163.239
3.3V: C3.2 C21.1 L1.2 P2.4 P2.5 R2.1 R15.2 R33.2 TP16.1 U2.5 | length 49.1
  Top Layer w0.2: R33.2@232.37,150.641 232.691,150.641 v1(235.3,153.25)
  Top Layer w0.5: v2(209.119,163.921) 209.572,164.727 209.573,164.724 v2(209.911,163.859) ; v2(209.328,165.52) 209.573,164.727 210.21,165.365 v2(210.225,165.35) ; 214.673,167.423 v3@214.85,167.247 ; P2.4@214.673,167.454 P2.4@214.673,167.95 ; v3@214.848,167.255 215.025,167.432 ; v3(214.85,167.05) v3@214.85,167.247 ; 214.85,167.842 v3@214.85,167.247 ; P2.5@215.025,167.454 P2.5@215.025,167.95
  PWR w0.5: v3(214.85,167.05) 214.85,166.853 215.323,166.381 217.7,166.381 218.4,165.681 230.811,165.681 231.18,166.05 233.751,166.05 234.795,165.006 235.831,165.006 237.467,163.37 237.467,155.417 v1(235.3,153.25)
  Bottom Layer w0.25: v3(214.85,167.05) C21.1@214.85,167.642
  Bottom Layer w0.254: R15.2@237.5,161.214 v1@237.5,162.344
  Bottom Layer w1: 204.837,162.24 205.521,161.556 L1.2@206.457,161.556
  other v1: 237.467,162.344
3.3V_SWITCHER_EN: C26.2 R1.1 R31.2 U2.1 | length 29.3
  Top Layer w0.15: v1(200.85,155.775) 200.85,155.84 201.312,156.303 201.312,158.891 200.9,159.303 v1(200.9,159.375) ; R31.2@220.167,165.425 C26.2@220.167,164.675 220.167,164.258 v1(220.6,163.825)
  PWR w0.15: v1(200.9,159.375) 200.9,159.479 204.196,162.775 219.55,162.775 v1(220.6,163.825)
  Bottom Layer w0.15: v1@200.812,159.391 U2.1@201.807,159.391 ; v1@200.85,155.766 R1.1@201.805,155.766
3.3V_SWITCHER_FB: U2.4
3.3V_SWITCHER_PG: R2.2 U2.6 | length 5.4
  Bottom Layer w0.25: U2.6@203.607,160.391 203.624,160.409 R2.2@208.973,160.409
3.3V_SWITCHER_SW: L1.1 U2.7
5V: C1.2 C2.2 C10.2 C11.2 C20.1 FB1.2 P2.1 P2.2 R1.2 R5.2 R16.2 TP14.1 U2.8 | length 49.7
  Top Layer w0.2: P2.1@213.1,167.85 213.1,167.3 v3(213.35,167.05) 213.6,167.3 P2.2@213.6,167.85
  Top Layer w0.25: R5.2@234.539,163.458 235.909,163.458 v1(236.065,163.303)
  PWR w0.5: v2(211.525,159.375) 212.31,158.59 216.01,158.59 216.775,157.825 230.567,157.825 230.72,157.977 231.25,157.977 231.625,157.602 231.625,157.374 233.162,155.836 233.162,155.112 234.049,154.224 234.949,154.224 235.977,155.252 235.977,162.02 236.065,162.108 v1(236.065,163.303)
  Bottom Layer w0.25: v3(213.35,167.05) C20.1@213.35,167.75
  Bottom Layer w0.35: v1(234.95,154.225) 235.217,154.225 R16.2@236.2,155.209
  Bottom Layer w0.4: C10.2@215.833,162.3 216.576,162.3 FB1.2@216.7,162.424
  Bottom Layer w0.5: v2(202.737,156.766) 203.475,157.504 C2.2@203.475,157.891 ; U2.8@203.607,159.361 203.607,158.023 C2.2@203.475,157.891 ; v2(207.703,157.778) 207.691,157.766 v2(206.469,157.766) 206.457,157.754 v2(205.235,157.754) 205.098,157.891 C2.2@203.475,157.891
  other v2: 203.971,156.778 209.849,156.905 209.837,158.139 209.825,159.373 211.525,160.625 211.525,161.85
CHASSIS_GND: C17.1 P1.6 | length 40.2
  Top Layer w1: 214.649,151.715 214.649,153.101 ; P1.6@215.4,152.35 215.4,152.85 v1(216.875,154.325) 218.4,152.8 v1(218.4,152.325) ; v1(220.3,152.325) 220.3,152.8 v1(221.825,154.325) 223.3,152.85 P1.6@223.3,152.35
  GND w0.25: 212.858,152.95 ccw(c212.5,152.95) 212.858,152.95
  GND w0.5: 207.95,153.6 ccw(c206.85,153.6) 207.95,153.6
  GND w1: 214.649,151.7 214.649,153.1
  PWR w0.25: 212.858,152.95 ccw(c212.5,152.95) 212.858,152.95
  PWR w0.5: 207.95,153.6 ccw(c206.85,153.6) 207.95,153.6
  PWR w1: 214.649,151.7 214.649,152.3 ; 214.649,152.3 214.649,153.101 214.654,153.106 214.654,152.305 214.649,152.3
  Bottom Layer w0.25: v1(212.5,152.95) C17.1@212.5,153.609 C17.1@212.5,153.825
  Bottom Layer w0.5: 215.848,153.741 217.912,153.741 ; 220.798,153.741 222.862,153.741
  Bottom Layer w1: 214.649,151.7 214.649,153.101 214.652,153.104
  other v6: 206.85,153.6
DIN: P3.4 Q1.6 R35.1 TP18.1 | length 7.8
  Top Layer w0.35: TP18.1@232.536,159.742 v3(235.308,159.742) 236.32,159.742 236.71,159.352 P3.4@237.483,159.352 ; TP18.1@232.536,159.902 TP18.1@232.709,160.075
  Bottom Layer w0.15: Q1.6@233.925,159.585 234.347,159.585 234.672,159.91 235.14,159.91 v3(235.308,159.742) R35.1@236.125,159.742
DOUT: P3.2 Q1.3 R34.1 TP19.1 | length 17.7
  Top Layer w0.25: v1(231.466,161.456) 230.092,161.456 229.595,160.959 TP19.1@229.595,160.618 229.929,160.285 230.545,160.285 232.916,157.914 236.594,157.914 237.032,158.352 P3.2@237.483,158.352 ; v1@231.466,161.497 233.243,161.497 233.846,162.1 v3(234.95,162.1)
  Bottom Layer w0.15: v1(231.466,161.456) 231.466,161.531 231.363,161.427 Q1.3@231.925,160.865 ; v3(234.95,162.1) 235.283,162.433 R34.1@236.125,162.433
EN_LED: C12.1 Q1.2 Q1.5 R18.1 | length 5.2
  Bottom Layer w0.15: C12.1@230.387,161.65 230.387,160.38 R18.1@230.233,160.225 Q1.2@231.925,160.225 Q1.5@233.925,160.225